# Altium PCB AD835乘法器.PcbDoc
Units mil, origin at the board's own origin, x right, y up, seen from the top; angles counter-clockwise.
Board outline 1345 x 1196 mil, 2 copper layers (Top Layer, Bottom Layer); 18 components, 10 nets, 52 pads, 2 vias.
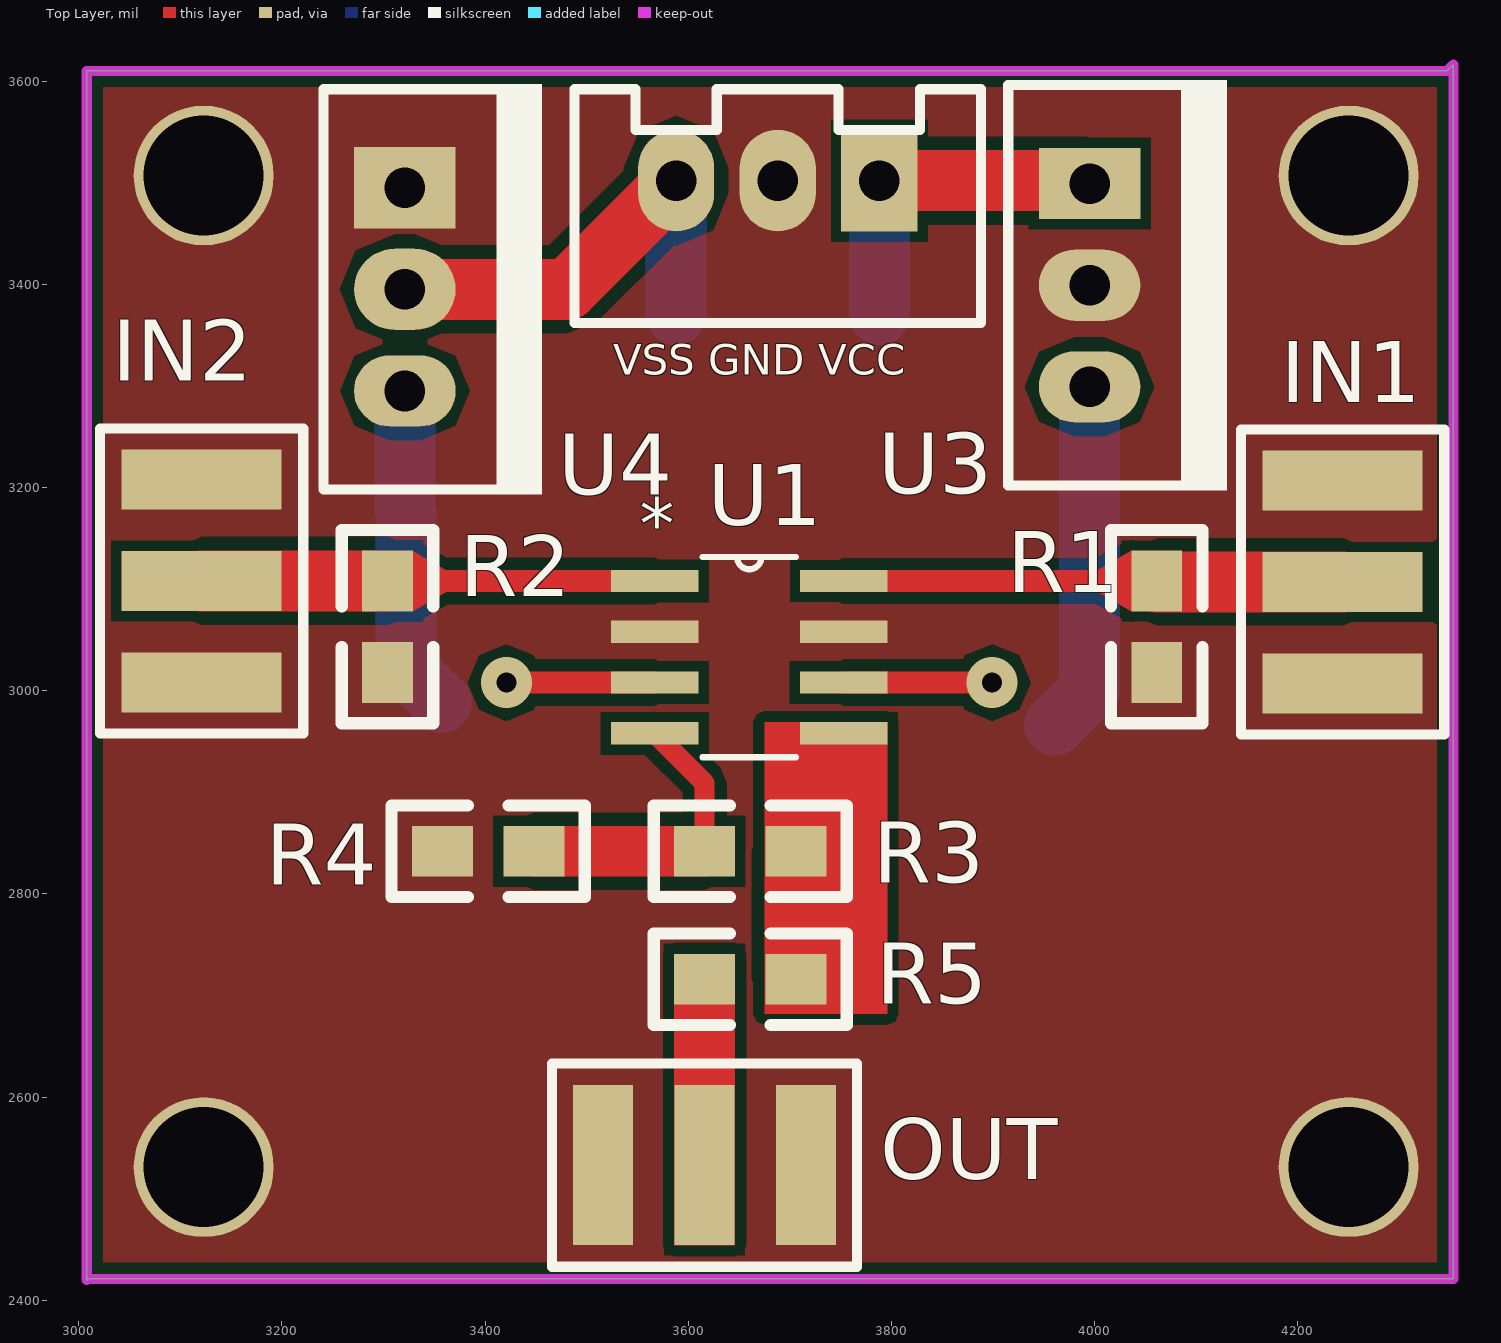
[diagram p0: Top Layer view]
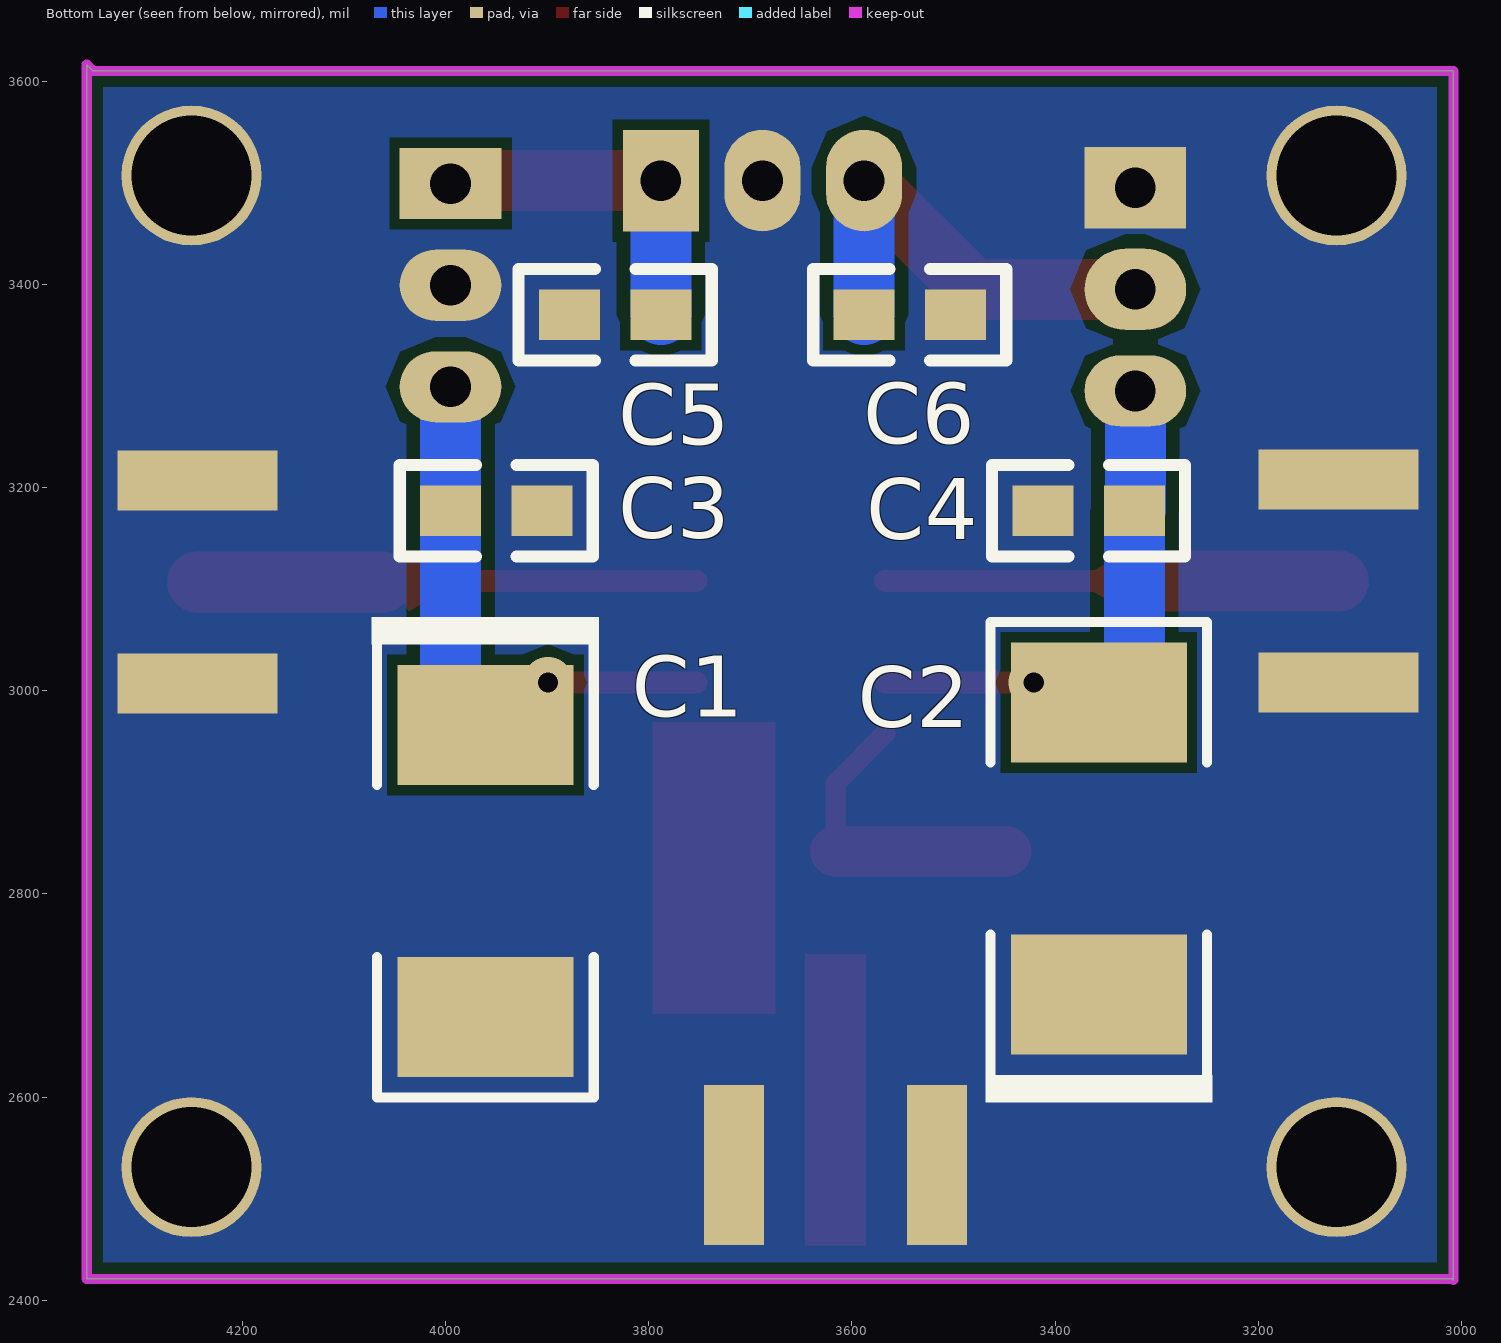
[diagram p1: Bottom Layer view, seen from below]

## Layer stack, top to bottom
Top Solder: solder mask 0.4, Solder Resist, Dk 3.5
Top Layer: signal copper 1.4
Dielectric 1: dielectric 12.6, FR-4, Dk 4.8
Bottom Layer: signal copper 1.4
Bottom Solder: solder mask 0.4, Solder Resist, Dk 3.5

## Board outline
3008,2420 3008,3610 4347,3610 4353,3616 4353,2421 3009,2421

## Design rules (kind name [scope] priority, off if disabled: settings)
Clearance [All] p1: gap=10 except(20: Arc-Fill Arc-Poly Track-Fill Track-Poly SMDPad-Fill SMDPad-Poly THPad-Fill THPad-Poly Via-Fill Via-Poly Fill-Fill Fill-Poly Poly-Poly)
PlaneClearance [All] p1: clearance=40
PolygonConnect [All] p1: connectstyle=Direct reliefconductorwidth=10 reliefentries=4 polygonreliefangle="90 Angle" airgapwidth=10
RoutingVias [All] p1: holewidth=28 width=50 viastyle="Through Hole" minholewidth=28 minwidth=50 maxholewidth=28 maxwidth=50
SolderMaskExpansion [All] p1: expansion=4
Width [All] p1: maxlimit=60 minlimit=6 preferedwidth=10
29 further rules are at their usual default settings.

## Components (designator, comment, footprint, x,y, rotation, side; value= is the part's Value field where it differs from the comment)
C1 "4.7uf" 7343C-TYPE_D 3960.62,2966.16 r90 bottom
C2 "4.7uf" 7343C-TYPE_D 3357,2701 r270 bottom
C3 "0.01uF" 0805 3905,3177 r0 bottom
C4 "Cap1" 0805 3412,3177 r180 bottom
C5 "Cap1" 0805 3878,3370 r180 bottom
C6 "Cap1" 0805 3498,3370 r0 bottom
IN1 "SMA-2" SMA-2 4244,3107 r90 top
IN2 "SMA-2" SMA-2 3121,3108 r270 top
OUT "SMA-2" SMA-2 3616,2533 r0 top
R1 "RES" 0805 4061,3108 r270 top
R2 "RES" 0805 3304,3018 r90 top
R3 "RES" 0805 3616,2842 r0 top
R4 "RES" 0805 3358,2842 r0 top
R5 "RES" 0805 3706,2716 r180 top
U1 "AD835AR" R_8 3660,3033 r0 top
U3 "LM7805" TO-220#1 3995,3499 r270 top
U4 "LM7905" TO-220#2 3321,3495 r270 top
"VSS GND VCC" "XH2.54-3p" XH2.54-3p 3788,3502 r180 top (schematic designator U2)

## Footprints (in the part's own frame and the unit in brackets; to place one, negate y for a bottom-side part, rotate by r counter-clockwise, add the part's x,y. Pads: shape width x height; smd on the part's side, far side on the other; paste and mask are expansions set on the pad)
0805 [mil]
  rect 60x50 smd: 1(0,0) 2(90,0)
  silkscreen extent -50,-45 140,45
7343C-TYPE_D [mm]
  rect 3x4.4 smd: 1(0,0) 2(-7.3,0)
  silkscreen extent -9.31,-2.84 2.7,2.84
R_8 [mil]
  rect 86x22 smd: 1(-93,75) 2(-93,25) 3(-93,-25) 4(-93,-75) 5(93,-75) 6(93,-25) 7(93,25) 8(93,75)
  silkscreen extent -46,-98 46,98, body extent -122,-98 122,98, height 69
SMA-2 [mm]
  rect 1.5x4 smd: 1(0,0)
  rect 1.5x4 all layers, no hole: 2(2.54,0) 3(-2.54,0)
  silkscreen extent -3.81,-2.54 3.81,2.54, body extent -3,-11.89 3,1.71, height 3.2
TO-220#1 [mil]
  rect 70x100 hole 40: 1(0,0)
  oval 70x100 hole 40: 2(100,0) 3(200,0)
  silkscreen extent -102,-80 302,135
TO-220#2 [mil]
  rect 80x100 hole 40: 1(0,0)
  oval 80x100 hole 40: 2(100,0)
  oval 70x100 hole 40: 3(200,0)
  silkscreen extent -102,-80 302,135
XH2.54-3p [mil]
  rect 75x100 hole 40: 1(0,0)
  oval 75x100 hole 40: 2(100,0) 3(200,0)
  silkscreen extent -100,-90 300,140

## Part data
C1 C2: library part Cap
C3: library part Cap1
U1: "Imported"

## Free pads (board coordinates)
  round 137.8 hole 118.11: 0(3123,3507) 1(3123,2531) 2(4250,2531) 3(4250,3507)

## Via types
v1: diameter 50, hole 20, Top Layer to Bottom Layer, 2 vias

## Nets (pads, with @x,y where several pads share a name; then routed paths per layer and width w, separated by ;. In a path a pad name is that pad's centre, name@x,y a point inside that pad or via, vN(x,y) a via of type N, cw(c..) or ccw(c..) an arc to the next point about the centre after c; other vN are vias at no path point)
GND: "VSS GND VCC.2" C1.2 C2.1 C3.1 C4.1 C5.1 C6.1 IN1.2 IN1.3 IN2.2 IN2.3 OUT.2 OUT.3 pad.0 pad.1 pad.2 pad.3 R1.2 R2.1 R4.1 U1.2 U1.7 U3.2 U4.1
NetC1_1: C1.1 C3.2 U1.6 U3.3 | length 493.1
  Top Layer w22: U1.6 v1(3899,3008)
  Bottom Layer w60: C1.1 3995,3000.54 C3.2 U3.3
NetC2_2: C2.2 C4.2 U1.3 U4.3 | length 466.1
  Top Layer w22: v1(3421,3008) U1.3
  Bottom Layer w60: C4.2@3321,3178 U4.3 ; C4.2 3322,3023.4 C2.2
NetC5_2: "VSS GND VCC.1" C5.2 U3.1 | length 340.2
  Top Layer w60: 3788,3502 3992,3502 U3.1
  Bottom Layer w60: C5.2 3788,3502
NetC6_2: "VSS GND VCC.3" C6.2 U4.2 | length 443.3
  Top Layer w60: U4.2 3481,3395 3588,3502
  Bottom Layer w60: C6.2 3588,3502
NetIN1_1: IN1.1 R1.1 U1.8 | length 490
  Top Layer w22: U1.8 R1.1
  Top Layer w60: R1.1@4062,3107 IN1.1
NetIN2_1: IN2.1 R2.2 U1.1 | length 446
  Top Layer w22: R2.2 U1.1
  Top Layer w60: IN2.1 R2.2
NetOUT_1: OUT.1 R5.2
NetR3_1: R3.1 R4.2 U1.4 | length 304.3
  Top Layer w20: U1.4 3616,2909 R3.1
  Top Layer w50: R4.2 R3.1
NetR3_2: R3.2 R5.1 U1.5 | length 261.5
  Top Layer w20: R3.2 3706,2892 3753,2939 U1.5
  Top Layer w60: R5.1 R3.2

## Polygon pours and split planes (outlines as drawn)
GND on Bottom Layer "Top Layer-No Net" (solid, pour order 6): 3008,3610 4347,3610 4353,3616 4353,2421 3009,2421 3008,2420
GND on Top Layer "Top Layer-No Net" (solid, pour order 4): 3008,3610 3013,3605 4353,3605 4353,2421 4352,2420 3008,2420

## Keep-outs
Keep-Out Layer:
  the board outline again, w10

## Other copper
Top Layer:
  region net NetIN2_1: 3329,3078 3363.02,3097.64 3353,3115 3318.98,3095.36
  region net NetIN1_1: 4012,3104 4044.72,3122.89 4036,3138 4003.28,3119.11
  region net NetIN1_1: 4036,3078 4047.69,3098.24 4010,3120 3998.31,3099.76
  region net NetIN2_1: 3363.02,3097.64 3371.74,3112.75 3328,3138 3319.28,3122.9
  rectangle net NetOUT_1: 3586,2454 3646,2741
  rectangle net NetR3_2: 3675,2682 3796,2969

## Text inside footprints (layer, text, board x,y; h text height)
U1: Top Overlay "*" at 3552,3140 h50; Mechanical 13 "*" at 3552,3140 h50